# Altium PCB JackNoiDenChop.PcbDoc
Units mil, origin at the board's own origin, x right, y up, seen from the top; angles counter-clockwise.
Board outline 8464.57 x 1574.8 mil, 2 copper layers (Top Layer, Bottom Layer); 7 components, 29 nets, 57 pads, 0 vias.
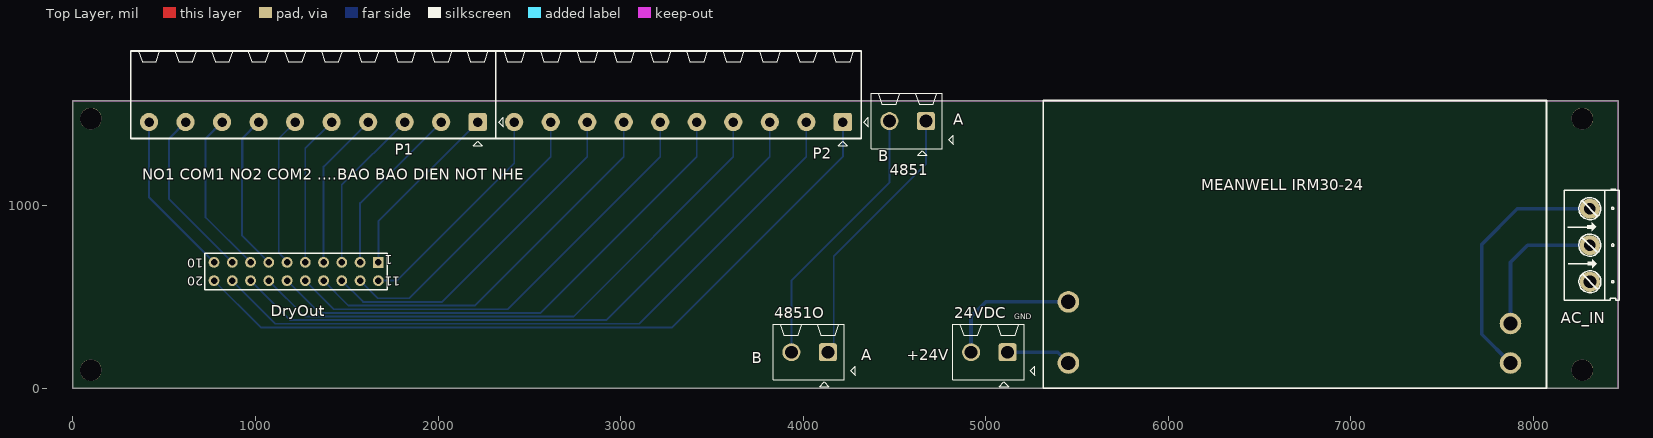
[diagram p0: Top Layer view]
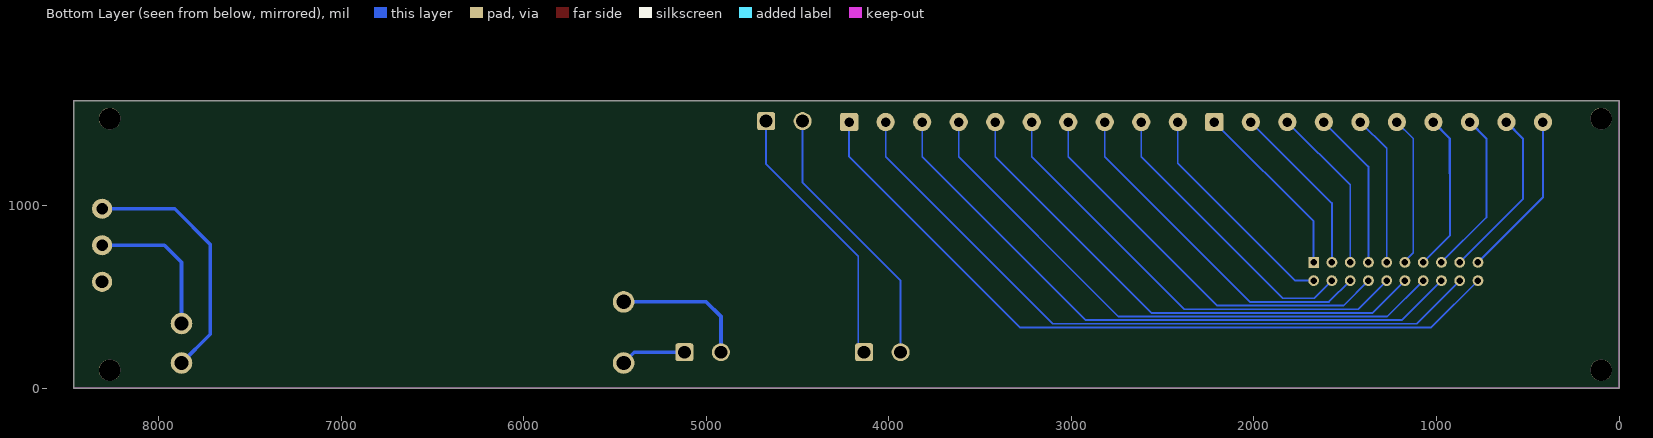
[diagram p1: Bottom Layer view, seen from below]
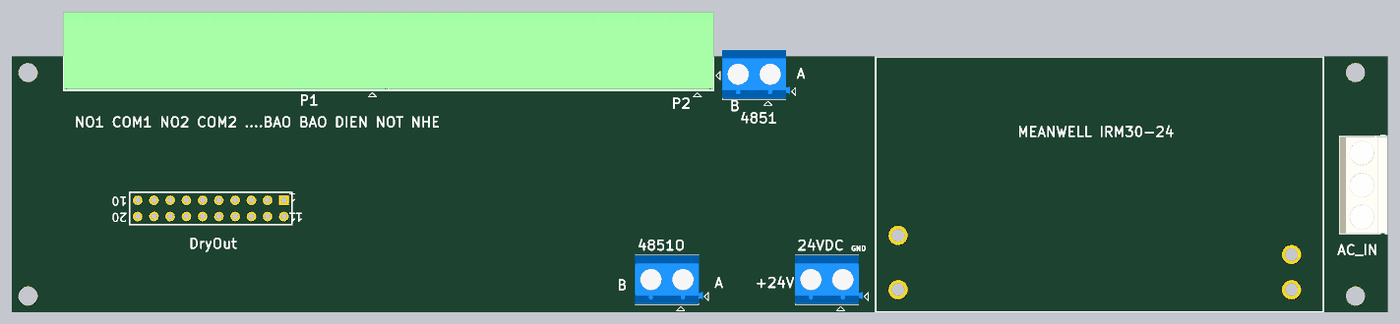
[diagram p2: 3D render of the assembled board from above, using the file's embedded part models]

## Layer stack, top to bottom
Top Solder: solder mask 0.4, Solder Resist, Dk 3.5
Top Layer: signal copper 1.4
Dielectric 1: dielectric 12.6, FR-4, Dk 4.8
Bottom Layer: signal copper 1.4
Bottom Solder: solder mask 0.4, Solder Resist, Dk 3.5

## Board outline
0,0 8464.57,0 8464.57,1574.8 0,1574.8

## Design rules (kind name [scope] priority, off if disabled: settings)
Clearance [All] p1: gap=10 ignorepadtopadclearanceinfootprint=FALSE except(0: Arc-Hole Track-Hole SMDPad-Hole THPad-Hole Via-Hole Fill-Hole Poly-Hole Region-Hole Text-Hole)
PolygonConnect [All] p1: connectstyle=Relief reliefconductorwidth=10 reliefentries=4 polygonreliefangle="90 Angle" airgapwidth=10
RoutingVias [All] p1: holewidth=28 width=50 viastyle="Through Hole" minholewidth=28 minwidth=50 maxholewidth=28 maxwidth=50
SolderMaskExpansion [All] p1: expansion=4
Width [All] p1: maxlimit=50 minlimit=10 preferedwidth=10
30 further rules are at their usual default settings.

## Components (designator, comment, footprint, x,y, rotation, side; value= is the part's Value field where it differs from the comment)
24VDC "Giắc xanh 5.08mm" 2P_PCB1 5019.68,196.85 r90 top value="2 position"
4851 "Giắc xanh 5.08mm" 2P_PCB1 4572.32,1462.52 r90 top value="2 position"
4851O "Giắc xanh 5.08mm" 2P_PCB1 4035.43,196.85 r90 top value="2 position"
AC_IN "Giăc xanh 3 chân, khoảng cách chân 200mil/5.08mm" 3P_ScrewTerm_200mil 8169.29,1082.68 r270 top
DryOut "Header 10X2A" HDR2X10_CEN 1673.23,688.98 r180 top (schematic designator DryOut?)
P1 "Giắc xanh 10 chân, khoảng cách chân 5.08mm" 10P_200mil 2217.32,1457.52 r180 top
P2 "Giắc xanh 10 chân, khoảng cách chân 5.08mm" 10P_200mil 4217.32,1457.52 r180 top

## Footprints (in the part's own frame and the unit in brackets; to place one, negate y for a bottom-side part, rotate by r counter-clockwise, add the part's x,y. Pads: shape width x height; smd on the part's side, far side on the other; paste and mask are expansions set on the pad)
2P_PCB1 [mm]
  rrect25% 2.5x2.5 hole 1.8: 1(0,-2.54)
  round 2.5 hole 1.8: 2(0,2.54)
  silkscreen extent -4.78,-6.35 3.9,5.08, body extent -3.71,-5.47 3.89,5.13, height 10.01
3P_ScrewTerm_200mil [mm]
  round 2.8 hole 1.6: 1(2.54,3.556) 2(7.62,3.556)
  round 2.8 hole 1.8: 3(12.7,3.556)
  silkscreen extent -0.15,0 15.24,7.62, body extent 0.12,0 15.12,7.5, height 10
10P_200mil [mil]
  rrect25% 100x100 hole 52: 1(0,0)
  round 100 hole 52: 2(200,0) 3(400,0) 4(600,0) 5(800,0) 6(1000,0) 7(1200,0) 8(1400,0) 9(1600,0) 10(1800,0)
  silkscreen extent -140,-390 1900,130, body extent -100,-390 1900,83, height 339
HDR2X10_CEN [mm] "Connector; Header; 10x2 Position"
  rect 1.5x1.5 hole 0.9: 1(0,0)
  round 1.5 hole 0.9: 2(2.54,0) 3(5.08,0) 4(7.62,0) 5(10.16,0) 6(12.7,0) 7(15.24,0) 8(17.78,0) 9(20.32,0) 10(22.86,0) 11(0,2.54) 12(2.54,2.54) 13(5.08,2.54) 14(7.62,2.54) 15(10.16,2.54) 16(12.7,2.54) 17(15.24,2.54) 18(17.78,2.54) 19(20.32,2.54) 20(22.86,2.54)
  silkscreen extent -1.27,-1.27 24.13,3.81, body extent -1.27,-1.27 24.13,3.81, height 7

## Part data
24VDC 4851 4851O: library part 2P_ScrewTerm_90S_3.81MM, "Terminal Block Screw Type THT 2-Position 3.81mm pitch", Color=Black, Manufacturer 1="Tyco Electronics", Manufacturer Part Number 1=1776113-2, Package / Case="Side Entry; 3.81mm pitch", Supplier Part Number 1=A97976-ND, Category="Connectors Interconnects", Pitch="0.150\" (3.81mm)", Positions Per Level=2, Supplier 1=Digi-Key, vl="Gi?c xanh 5.08mm"
AC_IN: library part 3P_ScrewTerm_200mil, "Terminal Block THT 3-Position header 5.08mm/200mil pitch", vl="Giac xanh 3 chân, kho?ng cách chân 200mil/5.08mm"
DryOut: "Header, 10-Pin, Dual row", LatestRevisionDate=17-Jul-2002, LatestRevisionNote="Re-released for DXP Platform.", Publisher="Altium Limited"
P1 P2: library part MHDR1X10, "Header, 10-Pin", LatestRevisionDate=17-Jul-2002, LatestRevisionNote="Re-released for DXP Platform.", Publisher="Altium Limited"

## Free pads (board coordinates)
  round 118.11 hole 78.74: 1(5452.76,472.44) 2(5452.76,137.8) 3(7874.02,137.8) 4(7874.02,354.33)
  round 118.11 hole 118.11: H(98.43,98.43) H(98.43,1476.38) H(8267.72,98.43) H(8267.72,1476.38)

## Nets (pads, with @x,y where several pads share a name; then routed paths per layer and width w, separated by ;. In a path a pad name is that pad's centre, name@x,y a point inside that pad or via, vN(x,y) a via of type N, cw(c..) or ccw(c..) an arc to the next point about the centre after c; other vN are vias at no path point)
48V_M_1: DryOut.12 P2.9 | length 1595.1
  Bottom Layer w10: DryOut.12 1669.68,492.52 1842.32,492.52 2617.32,1267.52 P2.9
48V_M_2: DryOut.14 P2.7 | length 2228.2
  Bottom Layer w10: DryOut.14 1509.68,452.52 2202.32,452.52 3017.32,1267.52 P2.7
48V_M_3: DryOut.16 P2.5 | length 2861.3
  Bottom Layer w10: DryOut.16 1349.68,412.52 2562.32,412.52 3417.32,1267.52 P2.5
48V_M_4: DryOut.18 P2.3 | length 3494.5
  Bottom Layer w10: DryOut.18 1189.68,372.52 2922.32,372.52 3817.32,1267.52 P2.3
48V_M_5: DryOut.20 P2.1 | length 4127.6
  Bottom Layer w10: DryOut.20 1029.68,332.52 3282.32,332.52 4217.32,1267.52 P2.1
48V_P_1: DryOut.11 P2.10 | length 1235.7
  Bottom Layer w10: DryOut.11 1773.78,588.98 2417.32,1232.52 P2.10
48V_P_2: DryOut.13 P2.8 | length 1911.6
  Bottom Layer w10: DryOut.13 1589.68,472.52 2022.32,472.52 2817.32,1267.52 P2.8
48V_P_3: DryOut.15 P2.6 | length 2544.8
  Bottom Layer w10: DryOut.15 1429.68,432.52 2382.32,432.52 3217.32,1267.52 P2.6
48V_P_4: DryOut.17 P2.4 | length 3177.9
  Bottom Layer w10: DryOut.17 1269.68,392.52 2742.32,392.52 3617.32,1267.52 P2.4
48V_P_5: DryOut.19 P2.2 | length 3811
  Bottom Layer w10: DryOut.19 1109.68,352.52 3102.32,352.52 4017.32,1267.52 P2.2
+24V: 24VDC.2 pad.1 | length 761.6
  Bottom Layer w20: 24VDC.2 4919.68,392.13 5000,472.44 pad.1
COM1: DryOut.9 P1.9 | length 949.1
  Bottom Layer w10: 527.32,1177.52 527.32,1034.88 DryOut.9
  Bottom Layer w12: 527.32,1177.52 527.32,1367.52 P1.9
COM2: DryOut.7 P1.7 | length 866.3
  Bottom Layer w10: 927.32,1177.52 927.32,834.88 DryOut.7
  Bottom Layer w12: 927.32,1177.52 927.32,1367.52 P1.7
COM3: DryOut.5 P1.5 | length 828.2
  Bottom Layer w10: DryOut.5 1273.23,1313.43 P1.5
COM4: DryOut.3 P1.3 | length 911.1
  Bottom Layer w10: DryOut.3 1473.23,1113.43 P1.3
COM5: DryOut.1 P1.1 | length 1028.6
  Bottom Layer w10: DryOut.1@1697.76,713.5 DryOut.1 1673.23,913.43 P1.1
G: AC_IN.3
GND: 24VDC.1 pad.2 | length 357.5
  Bottom Layer w20: 24VDC.1 5393.7,196.85 pad.2
L: AC_IN.1 pad.3 | length 1388.5
  Bottom Layer w20: pad.3 7716.54,295.28 7716.54,787.4 7911.81,982.68 AC_IN.1
N: AC_IN.2 pad.4 | length 808.7
  Bottom Layer w20: pad.4 7874.02,688.98 7967.72,782.68 AC_IN.2
Net4851_1: 4851.1 4851O.1 | length 1488.1
  Bottom Layer w10: 4851O.1 4167.34,228.76 4167.34,722.46 4672.32,1227.44 4851.1
Net4851_2: 4851.2 4851O.2 | length 1488.1
  Bottom Layer w10: 4851O.2 3935.43,588.98 4472.32,1125.87 4851.2
Net4852_1: 
Net4852_2: 
NO1: DryOut.10 P1.10 | length 916
  Bottom Layer w12: P1.10 417.32,1044.88 DryOut.10
NO2: DryOut.8 P1.8 | length 907.7
  Bottom Layer w10: 727.32,1177.52 727.32,934.88 DryOut.8
  Bottom Layer w12: 727.32,1177.52 727.32,1367.52 P1.8
NO3: DryOut.6 P1.6 | length 824.8
  Bottom Layer w10: DryOut.6 1173.23,694.58 1127.32,740.48 1127.32,1367.52 P1.6
NO4: DryOut.4 P1.4 | length 869.7
  Bottom Layer w10: DryOut.4 1373.23,1213.43 P1.4
NO5: DryOut.2 P1.2 | length 952.5
  Bottom Layer w10: DryOut.2 1573.23,1013.43 P1.2

## Keep-outs
Keep-Out Layer:
  the board outline again, w5.91

## Silkscreen, mask and mechanical layers (free items; w line width, h text height)
Top Overlay:
  lines w10: 5314.96,0 5314.96,1574.8 8070.87,1574.8 8070.87,0 5314.96,0
  text "A" at 4822.32,1442.52 h60
  text "B" at 4411.52,1242.52 h60
  text "NO1 COM1 NO2 COM2 ....BAO BAO DIEN NOT NHE" at 378.9,1142.52 h60
  text "MEANWELL IRM30-24" at 6181.1,1082.68 h60
  text "GND" at 5157.32,377.52 h30
  text "A" at 4317.32,152.52 h60
  text "+24V" at 4567.32,152.52 h60
  text "B" at 3717.32,137.8 h60

## Text inside footprints (layer, text, board x,y; h text height)
DryOut: Top Overlay "1" at 1753.23,728.98 h50 r180; Top Overlay "1" at 1793.23,608.98 h50 r180; Top Overlay "1" at 1753.23,608.98 h50 r180; Top Overlay "10" at 713.23,708.98 h50 r180; Top Overlay "20" at 713.23,608.98 h50 r180